# Altium PCB 400006.PcbDoc
Units mil, origin at the board's own origin, x right, y up, seen from the top; angles counter-clockwise.
Board outline 2196 x 1586 mil, 2 copper layers (Top Layer, Bottom Layer), stack 64.409 mil thick; 65 components, 72 nets, 278 pads, 196 vias.
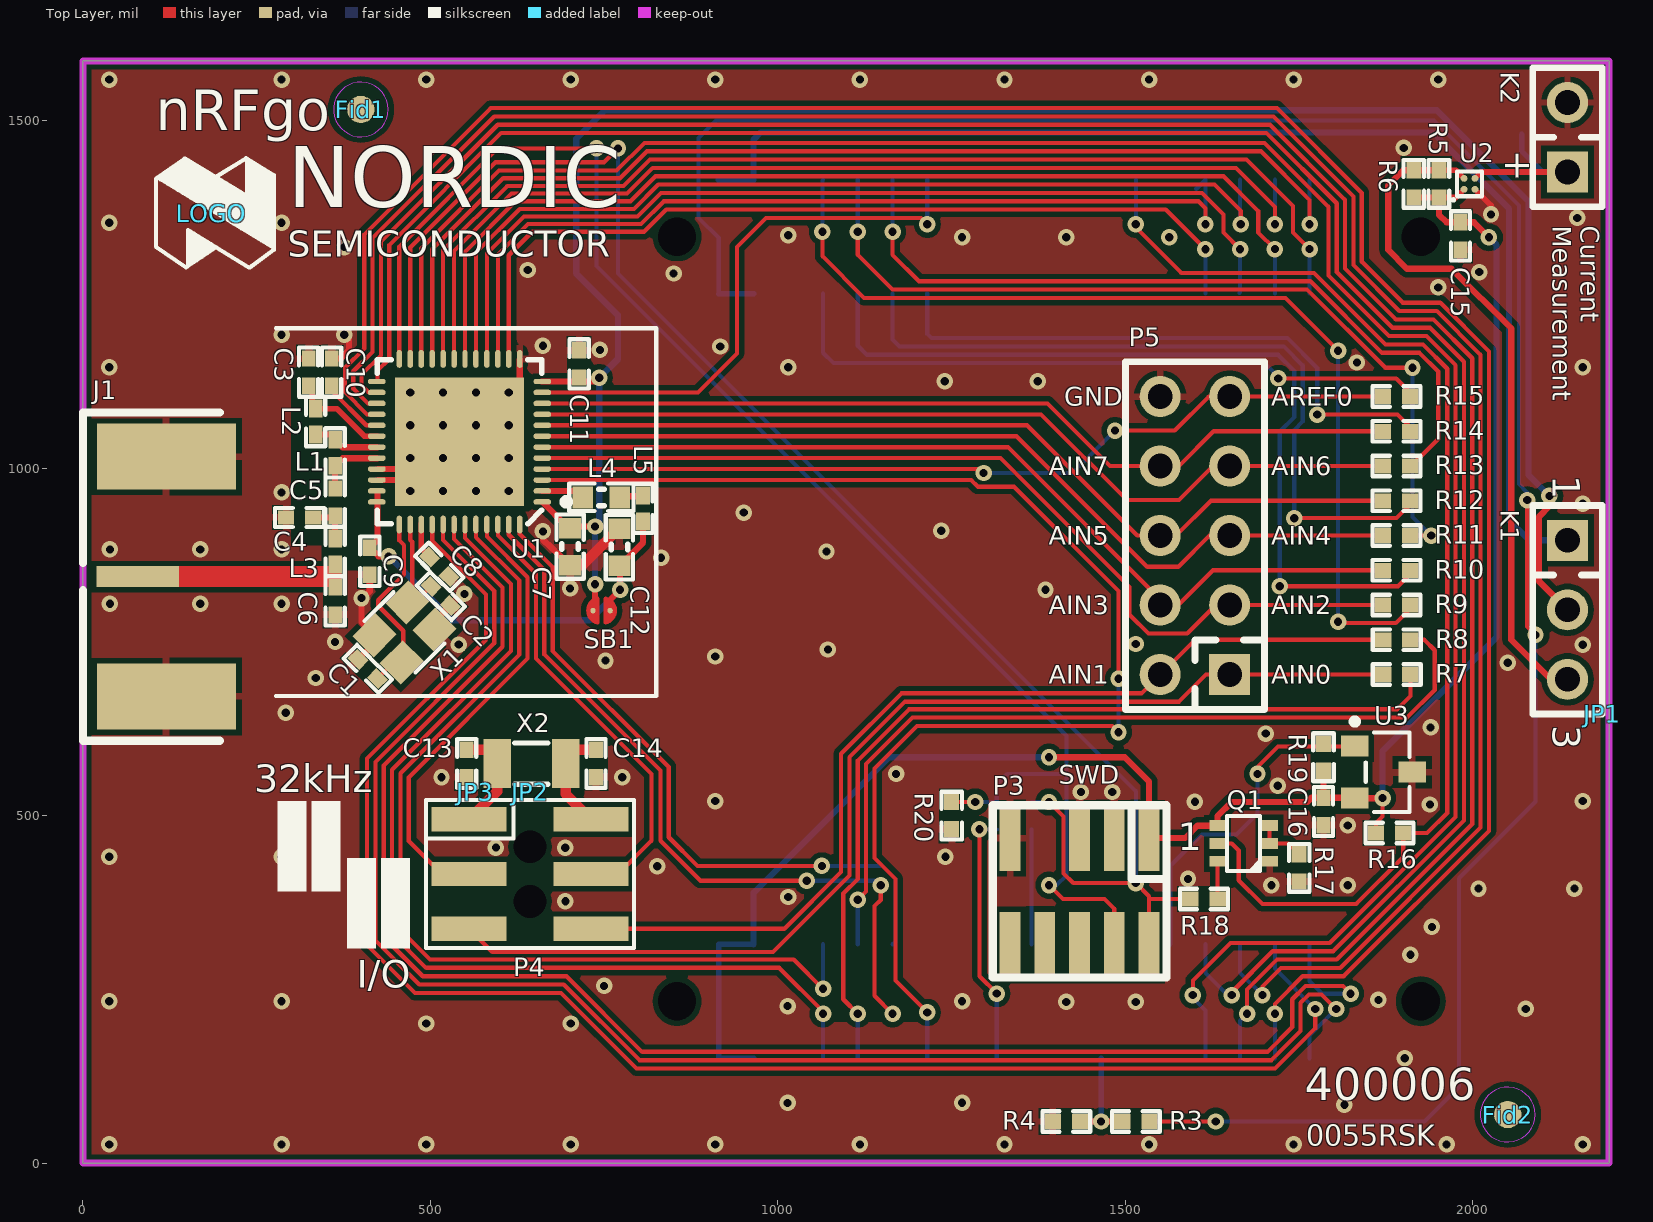
[diagram p0: Top Layer view]
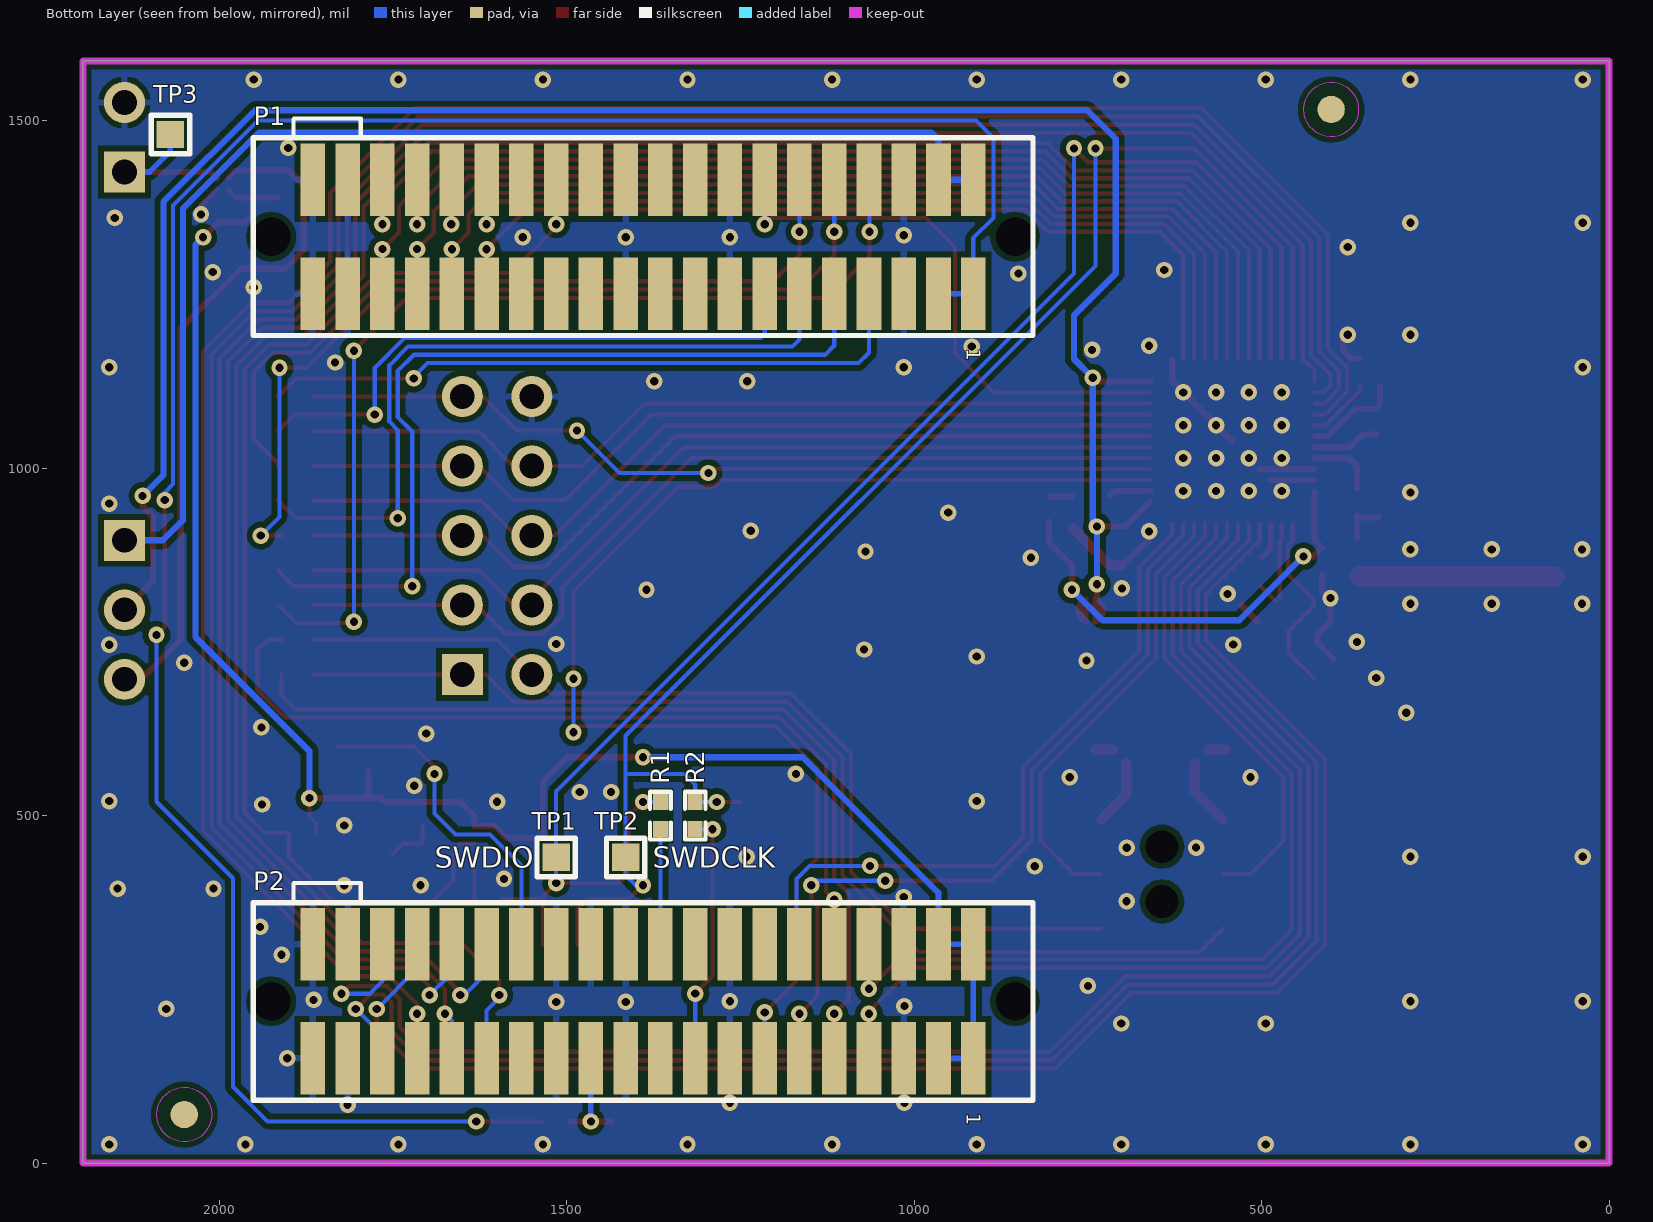
[diagram p1: Bottom Layer view, seen from below]
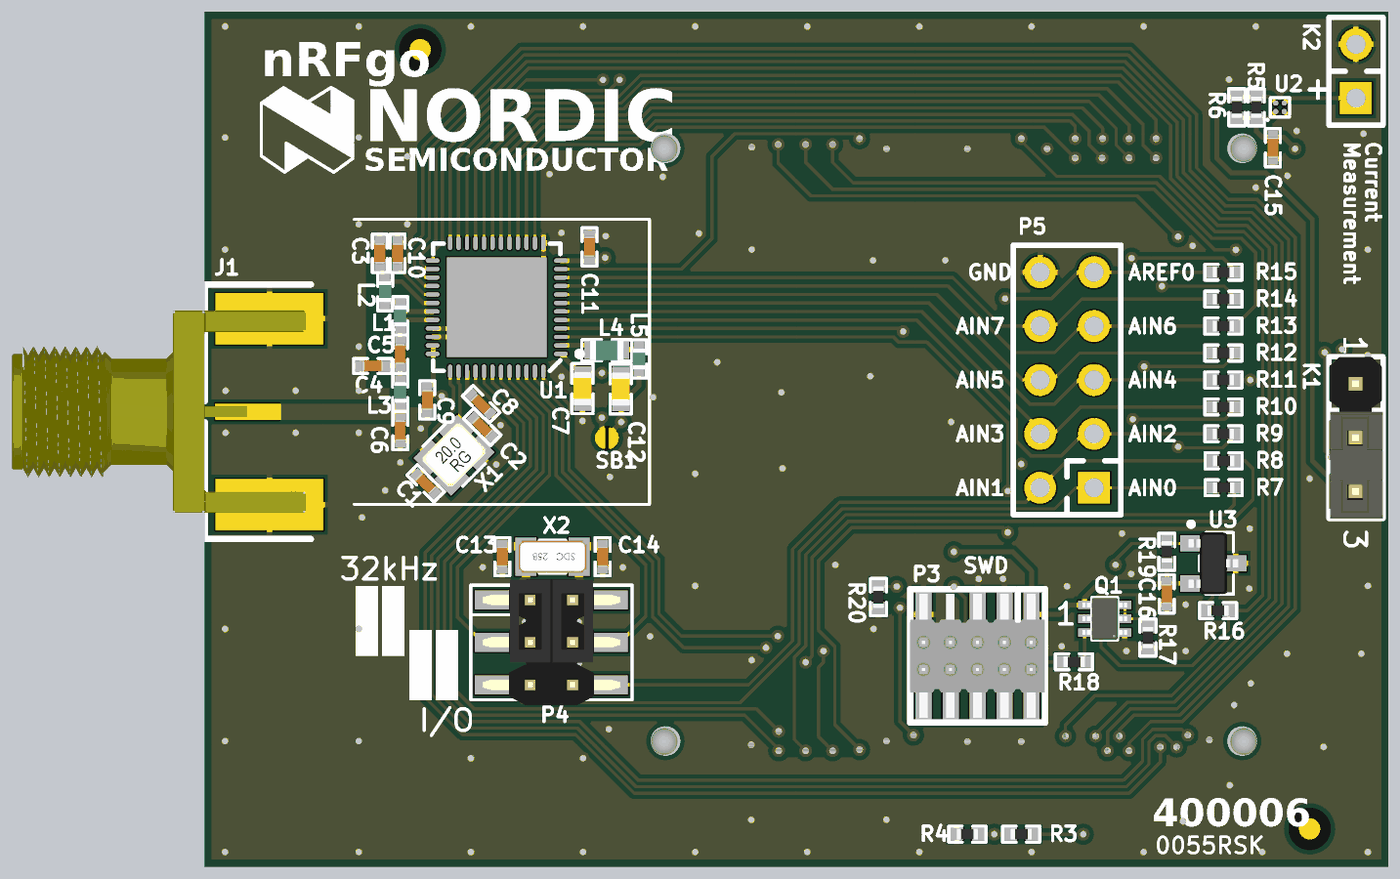
[diagram p2: 3D render of the assembled board from above, using the file's embedded part models]

## Layer stack, top to bottom
Top Layer: signal copper 0.7087
Dielectric: core 62.9921, FR-4, Dk 4.8
Bottom Layer: signal copper 0.7087

## Board outline
0,0 0,1586 2196,1586 2196,0

## Design rules (kind name [scope] priority, off if disabled: settings)
Clearance Clearance_ANT [(InNamedPolygon('Top Layer')) or (InNamedPolygon('Bottom Layer')) vs InNet('ANT')] p1: gap=8
Clearance Clearance_Poly [(InNamedPolygon('Top Layer')) or (InNamedPolygon('Bottom Layer'))] p2: gap=8
Clearance [All] p3: gap=5
ComponentClearance [All] p1 off: gap=10 collisioncheckmode=3 verticalgap=10 showdistances=FALSE
MinimumSolderMaskSliver [All] p1 off: minsoldermaskwidth=10
NetAntennae [All] p1 off: netantennaetolerance=0
PolygonConnect PolygonViaConnect [isVia and innet(gnd)] p1: connectstyle=Direct reliefconductorwidth=10 reliefentries=4 polygonreliefangle="90 Angle" airgapwidth=10
PolygonConnect PolygonConnect_1 [All] p2: connectstyle=Relief reliefconductorwidth=10 reliefentries=4 polygonreliefangle="90 Angle" airgapwidth=10
RoutingVias [All] p1: holewidth=12 width=24 viastyle="Through Hole" minholewidth=11.81 minwidth=23.62 maxholewidth=28 maxwidth=50
SilkToSilkClearance [All] p1 off: silktosilkclearance=10
SilkscreenOverComponentPads [All] p1 off: minsilkscreentomaskgap=10
SolderMaskExpansion [All] p1: expansion=3
Width [All] p1: maxlimit=200 minlimit=6 preferedwidth=6 minimp=50.000000 maximp=50.000000 favimp=50.000000
23 further rules are at their usual default settings.

## Components (designator, comment, footprint, x,y, rotation, side; value= is the part's Value field where it differs from the comment)
C1 "12pF" CAPC1005X04L 410,711 r135 top
C2 "12pF" CAPC1005X04L 515,816 r315 top
C3 "2.2nF" CAPC1005X04L 325,1138 r90 top
C4 "1.0pF" CAPC1005X04L 312,929 r180 top
C5 "2.2pF" CAPC1005X04L 363,951 r270 top
C6 "1.5pF" CAPC1005X04L 363,809 r270 top
C7 "4.7µF" CAPC1608X06L 701,887 r270 top
C8 "100nF" CAPC1005X04L 513,858 r315 top
C9 "1.0nF" CAPC1005X04L 413,866 r270 top
C10 "47nF" CAPC1005X04L 358,1138 r90 top
C11 "100nF" CAPC1005X04L 714,1150 r90 top
C12 "1.0µF" CAPC1608X06L 772,886.23 r90 top
C13 "12pF" CAPC1005X04L 552.39,575 r270 top
C14 "12pF" CAPC1005X04L 738.39,575 r270 top
C15 "100nF" CAPC1005X04L 1982,1334 r270 top
C16 "100nF" CAPC1005X04L 1785,506 r270 top
Fid1 "Fiducial mark" Fiducial 400,1516 r90 top
Fid2 "Fiducial mark" Fiducial 2050,70 r90 top
J1 "SMA Edge" SMA-Edge 79,844 r90 top
JP1 "Shunt 2.54mm" Shunt_2.54mm 2186,646.11 r90 top
JP2 "Shunt 2.00mm" Shunt_2.00mm 643.39,534.11 r270 top
JP3 "Shunt 2.00mm" Shunt_2.00mm 564.65,534.11 r270 top
K1 "Pin List 1x3" LIST_1x3 2136,896.11 r270 top
K2 "Pin List 1x2" LIST_1x2 2136,1426 r90 top
L1 "4.7nH" INDC1005X04L 363,1022 r270 top
L2 "10nH" INDC1005X04L 335,1067 r270 top
L3 "3.3nH" INDC1005X04L 363,880 r270 top
L4 "10µH" INDC1608X06L 746,958 r0 top
L5 "15nH" INDC1005X04L 806,942 r270 top
LOGO "Nordic Logo M" NORDIC_LOGO_M 185.02,1366.38 r0 top
P1 "Samtec SFC-120-T2-L-D-MOD A" "Samtec SFC-120-T2-L-D" 1390,1333 r90 top locked
P2 "Samtec SFC-120-T2-L-D-MOD B" "Samtec SFC-120-T2-L-D" 1390,233 r90 top locked
P3 "FTSH-105" HDR_2x5-SMD-1.27mm-SWD 1434,391 r180 top locked
P4 "Pin Header 2x3 SMD" HDR-2x3-SMD-2.0mm 643.39,416 r0 top
P5 "Pin Header 2x5" HDR_2x5 1600,903 r90 top
Q1 "FDG6321C" SC70-6 1707.4,434.41 r90 top
R1 "N.C." RESC1005X04L 1365,500 r270 bottom
R2 "N.C." RESC1005X04L 1315,500 r270 bottom
R3 "10k" RESC1005X04L 1515,60 r0 top
R4 "82k" RESC1005X04L 1415,60 r0 top
R5 "1R0" RESC1005X04L 1951,1409 r270 top
R6 "1R0" RESC1005X04L 1915,1409 r270 top
R7 "0R" RESC1005X04L 1890.39,703 r180 top
R8 "0R" RESC1005X04L 1890.39,753 r180 top
R9 "0R" RESC1005X04L 1890,803 r0 top
R10 "0R" RESC1005X04L 1890,853 r0 top
R11 "0R" RESC1005X04L 1890,903 r0 top
R12 "0R" RESC1005X04L 1890,953 r0 top
R13 "0R" RESC1005X04L 1890,1003 r0 top
R14 "0R" RESC1005X04L 1890,1053 r0 top
R15 "0R" RESC1005X04L 1890,1103 r0 top
R16 "10k" RESC1005X04L 1880,475 r0 top
R17 "10k" RESC1005X04L 1750,425 r270 top
R18 "150R" RESC1005X04L 1613,380 r0 top
R19 "150k" RESC1005X04L 1785,584 r270 top
R20 "12k" RESC1005X04L 1250,500 r270 top
SB1 "Solderbridge" Solderbridge 734,795 r0 top
TP1 "SWDIO" TP_SMD_1.0mmX1.0mm 1515,440 r180 bottom
TP2 "SWDCLK" TP_SMD_1.0mmX1.0mm 1415,440 r90 bottom
TP3 "1.0mm,SMD" TP_SMD_1.0mmX1.0mm 2070,1480 r270 bottom
U1 "nRF51822-QFAA" QFN40P600X600X90-48N 542,1038 r180 top
U2 "INA216A4" BGA4C40P2X2_76X76X62 1995,1409 r90 top
U3 "11AA160" SOT-23a 1830,600 r270 top
X1 "16MHz" BT-XTAL_2520 462.83,763.62 r45 top
X2 "32.768kHz" FC-135 645.39,575 r180 top

## Footprints (in the part's own frame and the unit in brackets; to place one, negate y for a bottom-side part, rotate by r counter-clockwise, add the part's x,y. Pads: shape width x height; smd on the part's side, far side on the other; paste and mask are expansions set on the pad)
BGA4C40P2X2_76X76X62 [mm] "BGA, 4-Leads, Body 0.8x0.8mm,  Pitch 0.40mm"
  round 0.25 smd: A1(-0.2,0.2) A2(0.2,0.2) B1(-0.2,-0.2) B2(0.2,-0.2)
  silkscreen extent -0.64,-0.45 0.45,0.64, body extent -0.38,-0.38 0.38,0.38, height 0.63
BT-XTAL_2520 [mm] "TSX-2520"
  rect 1.2x1.1 smd: 1(-0.85,-0.7) 2(0.85,-0.7) 3(0.85,0.7) 4(-0.85,0.7)
  silkscreen extent -1.55,-1.33 1.53,1.32, body extent -1.25,-1 1.27,1, height 0.56
CAPC1005X04L [mm] "Chip Capacitor, 2-Leads, Body 1.0x0.5mm, IPC High Density"
  rect 0.6x0.5 smd: 1(-0.5,0) 2(0.5,0)
  silkscreen extent -0.9,-0.35 0.9,0.35, body extent -0.73,-0.73 0.73,0.73, height 0.5
CAPC1608X06L [mm] "Chip Capacitor, 2-Leads, Body 1.6x0.8mm, IPC High Density"
  rect 0.75x0.8 smd: 1(-0.675,0) 2(0.675,0)
  silkscreen extent -1.17,-0.5 1.17,0.5, body extent -0.8,-0.43 0.8,0.43, height 0.8
FC-135 [mm] "EPSON TOYOCOM - FC-135 32.768KHZ ±20PPM,9.0PF - CRYSTAL, SM, WATCH"
  rect 1x1.8 smd: 1(-1.25,0) 2(1.25,0)
  silkscreen extent -0.6,-0.75 0.6,0.75, body extent -1.6,-0.75 1.6,0.75, height 0.81
Fiducial [mm] "Fiducial Mark"
  round 1 smd paste-10 mask+0.5: 0(0,0)
  round 1 smd far side paste-10 mask+0.5: 0(0,0)
  Keep-Out Layer circle w0.01: c0,0 r1
HDR-2x3-SMD-2.0mm [mm]
  round 1 hole 1.2: 0(0,-1) 0(0,1)
  rect 2.75x0.89 smd: 1(-2.225,2) 2(2.225,2) 3(-2.225,0) 4(2.225,0) 5(-2.225,-2) 6(2.225,-2)
  silkscreen extent -3.8,-2.7 3.8,2.7, body extent -3.25,-2.97 3.25,2.98, height 6.5
HDR_2x5 [mm] "Pin Header, 2.54mm through hole"
  rect 1.5x1.5 hole 0.9: 1(-5.08,-1.27)
  round 1.5 hole 0.9: 2(-5.08,1.27) 3(-2.54,-1.27) 4(-2.54,1.27) 5(0,-1.27) 6(0,1.27) 7(2.54,-1.27) 8(2.54,1.27) 9(5.08,-1.27) 10(5.08,1.27)
  silkscreen extent -6.35,-2.54 6.35,2.54
HDR_2x5-SMD-1.27mm-SWD [mm] "Pin Header, 1.27mm SMD, FTSH-105 series, \"SWD\" version"
  rect 0.76x2.4 smd: 1(-2.54,-1.95) 2(-2.54,1.95) 3(-1.27,-1.95) 4(-1.27,1.95) 5(0,-1.95) 6(0,1.95) 8(1.27,1.95) 9(2.54,-1.95) 10(2.54,1.95)
  silkscreen extent -3.18,-3.15 3.18,3.15, body extent -3.16,-2.92 3.19,2.92, height 4.33
INDC1005X04L [mm] "Chip Inductor, 2-Leads, Body 1.0x0.5mm, IPC High Density"
  rect 0.65x0.5 smd: 1(-0.475,0) 2(0.475,0)
  silkscreen extent -0.9,-0.35 0.9,0.35, body extent -0.5,-0.3 0.5,0.3, height 0.5
INDC1608X06L [mm] "Chip Inductor, 2-Leads, Body 1.6x0.8mm, IPC High Density"
  rect 0.75x0.8 smd: 1(-0.675,0) 2(0.675,0)
  silkscreen extent -1.17,-0.5 1.17,0.5, body extent -0.8,-0.48 0.8,0.47, height 0.8
LIST_1x2 [mm] "Pin List, 2.54mm through hole"
  rect 1.5x1.5 hole 0.9: 1(0,0)
  round 1.5 hole 0.9: 2(2.54,0)
  silkscreen extent -1.27,-1.27 3.81,1.27
LIST_1x3 [mm] "Pin List, 2.54mm through hole"
  rect 1.5x1.5 hole 0.9: 1(0,0)
  round 1.5 hole 0.9: 2(2.54,0) 3(5.08,0)
  silkscreen extent -1.27,-1.27 6.35,1.27, body extent -1.27,-1.27 6.25,1.23, height 8.2
NORDIC_LOGO_M [mil] "Medium Nordic Logo"
  silkscreen extent -80,-78 90,80
QFN40P600X600X90-48N [mm] "QFN, 48-Leads, Body 6,0x6,0mm (max), Pitch 0,40mm, IPC Medium Density"
  oval 0.65x0.2 smd: 1(-3.025,2.2) 2(-3.025,1.8) 3(-3.025,1.4) 4(-3.025,1) 5(-3.025,0.6) 6(-3.025,0.2) 7(-3.025,-0.2) 8(-3.025,-0.6) 9(-3.025,-1) 10(-3.025,-1.4) 11(-3.025,-1.8) 12(-3.025,-2.2) 25(3.025,-2.2) 26(3.025,-1.8) 27(3.025,-1.4) 28(3.025,-1) 29(3.025,-0.6) 30(3.025,-0.2) 31(3.025,0.2) 32(3.025,0.6) 33(3.025,1) 34(3.025,1.4) 35(3.025,1.8) 36(3.025,2.2)
  oval 0.2x0.65 smd: 13(-2.2,-3.025) 14(-1.8,-3.025) 15(-1.4,-3.025) 16(-1,-3.025) 17(-0.6,-3.025) 18(-0.2,-3.025) 19(0.2,-3.025) 20(0.6,-3.025) 21(1,-3.025) 22(1.4,-3.025) 23(1.8,-3.025) 24(2.2,-3.025) 37(2.2,3.025) 38(1.8,3.025) 39(1.4,3.025) 40(1,3.025) 41(0.6,3.025) 42(0.2,3.025) 43(-0.2,3.025) 44(-0.6,3.025) 45(-1,3.025) 46(-1.4,3.025) 47(-1.8,3.025) 48(-2.2,3.025)
  rect 4.7x4.7 smd: 49(0,0)
  silkscreen extent -4.03,-3 3,3, body extent -3,-3 3,3, height 0.9
RESC1005X04L [mm] "Chip Resistor, 2-Leads, Body 1.0x0.5mm, IPC High Density"
  rect 0.6x0.55 smd: 1(-0.5,0) 2(0.5,0)
  silkscreen extent -0.87,-0.38 0.88,0.38
"Samtec SFC-120-T2-L-D" [mm] "Samtec SFC series - Female"
  round 0.9 hole 1.4 unplated: 0(0,13.59) 0(0,-13.59)
  rect 2.65x0.9 smd far side: 1(-2.08,12.065) 2(2.08,12.065) 3(-2.08,10.795) 4(2.08,10.795) 5(-2.08,9.525) 6(2.08,9.525) 7(-2.08,8.255) 8(2.08,8.255) 9(-2.08,6.985) 10(2.08,6.985) 11(-2.08,5.715) 12(2.08,5.715) 13(-2.08,4.445) 14(2.08,4.445) 15(-2.08,3.175) 16(2.08,3.175) 17(-2.08,1.905) 18(2.08,1.905) 19(-2.08,0.635) 20(2.08,0.635) 21(-2.08,-0.635) 22(2.08,-0.635) 23(-2.08,-1.905) 24(2.08,-1.905) 25(-2.08,-3.175) 26(2.08,-3.175) 27(-2.08,-4.445) 28(2.08,-4.445) 29(-2.08,-5.715) 30(2.08,-5.715) 31(-2.08,-6.985) 32(2.08,-6.985) 33(-2.08,-8.255) 34(2.08,-8.255) 35(-2.08,-9.525) 36(2.08,-9.525) 37(-2.08,-10.795) 38(2.08,-10.795) 39(-2.08,-12.065) 40(2.08,-12.065)
  body extent -2.12,-14.29 2.13,14.29, height 4.69
SC70-6 [mm] "SC70-6 Industrial Package Dimensions"
  rect 0.4x0.6 smd: 1(0,0) 2(0.65,0) 3(1.3,0) 4(1.3,1.9) 5(0.65,1.9) 6(0,1.9)
  silkscreen extent -0.35,0.35 1.65,1.55, body extent -0.35,-0.1 1.65,2, height 0.92
Shunt_2.00mm [mil]
  body extent 2,2 156,77, height 238
Shunt_2.54mm [mil]
  body extent 0,0 198,98, height 300
SMA-Edge [mil] "SMA Edge connector"
  rect 30x118.11 smd paste-196.85: 1(0,0)
  rect 95x200 smd paste-196.85: 2(-172.5,-41.34) 2(172.5,-41.34)
  silkscreen extent -236,-118 236,79, body extent -187,-108 187,436, height 161
Solderbridge [mm]
  round 0.2 smd paste-10: 1(0,0) 2(0.625,0)
  Top Layer region: 0.236,-0.432 0.16,-0.505 0.042,-0.467 -0.023,-0.424 -0.097,-0.351 -0.15,-0.292 -0.208,-0.193 -0.236,-0.099 -0.231,0.122 -0.206,0.193 -0.122,0.33 -0.038,0.411 0.054,0.469 0.155,0.5 0.206,0.483 0.236,0.43
  Top Layer region: 0.389,0.432 0.465,0.505 0.583,0.467 0.648,0.424 0.721,0.351 0.775,0.292 0.833,0.193 0.861,0.099 0.856,-0.122 0.831,-0.193 0.747,-0.33 0.663,-0.411 0.571,-0.469 0.47,-0.5 0.419,-0.483 0.389,-0.43
  Top Layer lines w0.152: 0.159,-0.431 cw(c0.27,0) 0.159,0.431 ; 0.465,-0.431 ccw(c0.355,0) 0.465,0.431
SOT-23a [mil] "SOT-23 footprint"
  rect 30x40 smd: 1(0,0) 2(74.8,0) 3(37.4,82.68)
  silkscreen extent -39,-4 94,79, body extent -20,-5 95,87, height 39
TP_SMD_1.0mmX1.0mm [mm]
  rect 1x1 smd: 1(0,0)
  silkscreen extent -0.7,-0.7 0.7,0.7

## Part data
C1 C2 C13 C14: library part C0402-12p, "Capacitor, NP0, ±2%"
C3: library part C0402-2n2, "Capacitor, X7R, ±10%"
C4: library part C0402-1.0p, "Capacitor, NP0, ±0.1pF"
C5: library part C0402-2.2p, "Capacitor, NP0, ±0.1pF"
C6: library part C0402-1.5p, "Capacitor, NP0, ±0.1pF"
C7: library part C0603-4µ7, "Capacitor, X5R, ±10%"
C8 C11 C15 C16: library part C0402-100n, "Capacitor, X7R, ±10%"
C9: library part C0402-1n0, "Capacitor, X7R, ±10%"
C10: library part C0402-47n, "Capacitor, X7R, ±10%"
C12: library part C0603-1µ0, "Capacitor, X5R, ±10%"
Fid1 Fid2: library part Fid-Mark, "Fiducial Mark"
J1: library part SMA-Edge-Con, "SMA Edge connector"
JP1: library part "SHUNT JUMPER 2.54mm BLACK GOLD", "SHUNT JUMPER .1\" BLACK GOLD"
JP2 JP3: library part "SHUNT JUMPER 2.00mm BLACK GOLD", "SHUNT JUMPER .079\" BLACK GOLD"
K1: "Pin List 1x3, 2.54mm (100mil)"
K2: "Pin List 1x2, 2.54mm (100mil)"
L1: library part L0402-4n7, "Inductor, 160mA, ±0.1nH"
L2: library part L0402-10n, "Inductor, 100mA, ±2%"
L3: library part L0402-3n3, "Inductor, 190mA, ±0.1nH"
L4: library part L0603-10µ, "Inductor, 80mA, ±10%"
L5: library part L0402-15n, "Inductor, 320mA, ±5%"
LOGO: "Nordic Logo, medium size"
P1 P2: "1.27mm Pitch DIL Vertical SMT Socket Assembly, location pegs, double polarised, gold, 20+20-way"
P3: library part "Samtec Micro Header 10 - SWD", "SAMTEC - FTSH-105-01-L-DV - HEADER, 1.27MM, SMD, 10WAY"
P4: library part "Pin Header 2x3 SMD 2.0mm", "Pin Header 2x3, SMD, 2.0mm"
P5: "Pin Header 2x5, 2.54mm (100mil)"
Q1: "Fairchild, FDG6321C, Dual N & P Channel Digital FET"
R1 R2: library part R0402-N.C., "Not mounted"
R3 R16 R17: library part R0402-10k, "Resistor, ±1%, 0.063W"
R4: library part R0402-82k, "Resistor, ±1%, 0.063W"
R5 R6: library part R0402-1R0, "Resistor, ±1%, 0.063W"
R7 R8 R9 R10 R11 R12 R13 R14 R15: library part R0402-0R, "Resistor, ±5%, 0.063W"
R18: library part R0402-150, "Resistor, ±1%, 0.063W"
R19: library part R0402-150k, "Resistor, ±1%, 0.063W"
R20: library part R0402-12k, "Resistor, ±1%, 0.063W"
TP1 TP2 TP3: library part TP_SMD_1.0MM, "Regular Plated, 1.0mm hole"
U1: library part nRF51822-Q48-6x6_DCDC, "Multi-protocol Bluetooth Low Energy and 2.4GHz proprietary system-on-chip"
U2: "TEXAS INSTRUMENTS - INA216A4YFFT - IC, CURRENT SHUNT MONITOR, 4DSBGA"
U3: library part 11AA160T-I/TT, "MICROCHIP - 11AA160T-I/TT - IC, EEPROM, 16K, 1.8V, UNIO, SOT-23"
X1: library part NX2520SA-16MHZ-STD-CSW-5, "XTAL SMD 2520, 16MHz, 8pF, ±15ppm"
X2: library part "XTAL_FC-135 32.768k", "EPSON TOYOCOM - FC-135 32.768KHZ ±20PPM,9.0PF - CRYSTAL, SM, WATCH"

## Via types
v1: diameter 23.62, hole 11.81, Top Layer to Bottom Layer, tented both sides, 196 vias

## Nets (pads, with @x,y where several pads share a name; then routed paths per layer and width w, separated by ;. In a path a pad name is that pad's centre, name@x,y a point inside that pad or via, vN(x,y) a via of type N, cw(c..) or ccw(c..) an arc to the next point about the centre after c; other vN are vias at no path point)
AIN0: P4.5 P5.1 R7.2 | length 1587.9
  Top Layer w6: P4.5 589.05,304 992.97,304 1103,414.03 1103,584.14 1182.86,664 1577,664 1616,703 R7.2@1865,703
AIN1: P4.6 P5.2 R8.2 | length 1405.9
  Top Layer w6: P4.6 1009.26,337.26 1091,419 1091,589.11 1177.89,676 1523,676 1600,753 R8.2@1865,753
AIN2: P5.3 R9.1 U1.5 | length 1348.7
  Top Layer w6: U1.5 1320.4,1014.38 1506,828.77 1506,789 1533,762 1589,762 1630,803 R9.1@1865,803
AIN3: P5.4 R10.1 U1.6 | length 1318.7
  Top Layer w6: U1.6 1330.87,1030.13 1558,803 1576,803 1626,853 R10.1@1865,853
AIN4: P5.5 R11.1 U1.7 | length 1300.4
  Top Layer w6: U1.7 1343.47,1045.87 1531.34,858 1576,858 1621,903 P5.5 R11.1@1865,903
AIN5: P5.6 R12.1 U1.8 | length 1290.3
  Top Layer w6: U1.8 1358.38,1061.62 1517,903 P5.6 ; P5.6@1573,903 1623,953 R12.1@1865,953
  Top Layer w8: P5.6 P5.6@1573,903
AIN6: P5.7 R13.1 U1.9 | length 1275.3
  Top Layer w6: U1.9 1378.63,1077.37 1502,954 1577,954 1626,1003 R13.1@1865,1003
AIN7: P5.8 R14.1 U1.10 | length 1261.9
  Top Layer w6: U1.10 1387.88,1093.12 1478,1003 P5.8 1577,1003 1627,1053 R14.1@1865,1053
ANT: C6.1 J1.1 L3.2 | length 279
  Top Layer w30: J1.1 358,844
ANT1: L1.1 L2.2 U1.31 | length 96.4
  Top Layer w9: L2.2 355.4,1048.3 373.57,1030.13 U1.31@423.89,1030.13
ANT2: C5.1 L1.2 U1.32 | length 98.2
  Top Layer w9: C5.1 L1.2 374.08,1014.38 U1.32@424,1014.38
AREF0: P5.9 R15.1 U1.4 | length 1251.8
  Top Layer w6: U1.4 1290.37,998.63 v1(1296,993) ; v1(1485,1054) 1571,1054 1620,1103 P5.9 R15.1@1865,1103
  Bottom Layer w6: v1(1296,993) 1424,993 v1(1485,1054)
AVDD: C9.1 C12.1 L5.2 SB1.2 U1.35 U1.36 | length 642.9
  Top Layer w9: U1.35@423.89,966 423.89,896.57 C9.1 425.69,873 v1(440,873) ; 755.64,807.64 757.37,809.37 v1(773,825) 773,860 806,893 L5.2
  Bottom Layer w9: v1(440,873) 532,781 729,781 v1(773,825)
BOARDID: P2.23 R3.1 R4.2 | length 151.7
  Top Layer w8: R4.2 v1(1465,60) R3.1
  Bottom Layer w8: v1(1465,60) P2.23
BOARDID_EE: P2.28 R19.1 U3.1 | length 488.2
  Top Layer w6: v1(1690,560) 1690,570 1719.69,599.69 1785,599.69 U3.1@1829.69,599.69
  Bottom Layer w6: P2.28 1565,428 1610,473 1660,473 1690,503 v1(1690,560)
DEC1: C8.1 U1.39 | length 53
  Top Layer w8: U1.39@486.88,919.89 486.88,884.12 C8.1
DEC2: C10.1 U1.29 | length 93.4
  Top Layer w6: C10.1 358,1111.45 407.83,1061.62 U1.29@423.89,1061.62
GND: C1.2 C2.2 C3.2 C4.2 C6.2 C7.2 C8.2 C9.2 C10.2 C11.2 C12.2 C13.2 C14.2 C15.2 C16.2 J1.2 K2.2 P1.5 P1.6 P1.15 P1.16 P1.21 P1.22 P1.37 P1.38 P1.39 P1.40 P2.5 P2.6 P2.15 P2.16 P2.21 P2.22 P2.24 P2.25 P2.26 P2.37 P2.38 P2.39 P2.40 P3.3 P3.5 P3.9 P5.10 Q1.1 R4.1 R17.2 R20.2 U1.13 U1.33 U1.34 U1.49 U2.B1 U3.3 X1.2 X1.4 | length 733.5
  Top Layer w8: U2.B1 2026,1378 v1(2026,1365)
  Top Layer w9: C10.2 371.35,1157.69 383,1169.33 383,1185 v1(376,1192) ; C1.2 419.85,748.69 419.85,759.82 401,778.67 v1(401,813) ; v1@400,813 v1(401,813) ; C9.2 413,823 403,813 v1(401,813) ; U1.34@423.89,982.88 U1.49@486.88,982.88 ; U1.33@423.89,998.63 U1.49@502.63,998.63 ; U1.49 628.61,1124.61 U1.13@628.61,1156.11 ; v1(662,909) 662.42,896.51 C7.2
  Top Layer w10: X1.2@506.15,779.31 C2.2
  Top Layer w15: C7.2 718.85,860.43 C12.2@772,913.57
  other v1: 38,27 286,27 494,27 702,27 910,27 1118,27 1326,27 1534,27 1742,27 1962,27 2158,27 1815,84 1014,86.69 1265,87 1902,151 494,201 702,201 2076,222 1014,226 1415,232 1515,232 38,233 286,233 1265,233 1864,235 750,255 1910,299.89 1941,340 694.39,377 1015,383 2008,395 2146,395 1710,400 1820,400 1590,409 826.39,427.31 38,441 286,441 1241,441 594.39,454 694,453.77 1820,486 1938,516 1600,520 910,521 2158,521 1436,534 1481,534 1719,543 516,555.31 776,555.31 1170,560 1702,618 1939,627 292,648 335,698 2050,720 752,723.11 910,729 1072,739 541,746.11 2158,746 1515,747 363,750 39,805 169,805 286,805 549,819 1385,825 701,827 832,871 1070,880 39,883 169,883 286,883 1235,910 951,936 2158,949 286,965 471.13,967.13 518.38,967.13 565.62,967.13 612.87,967.13 471.13,1014.38 518.38,1014.38 565.62,1014.38 612.87,1014.38 471.13,1061.62 518.38,1061.62 565.62,1061.62 612.87,1061.62 471.13,1108.87 518.38,1108.87 565.62,1108.87 612.87,1108.87 1240,1125 1374,1125 38,1145 1015,1145 2158,1145 1833,1152 744,1170 917,1175 662,1176 286,1192 1950,1260 850,1280 2009,1282 640,1285 376,1318 1265,1332 1415,1332 1563,1332 1015,1335 38,1353 286,1353 2150,1360 1900.33,1460.69 38,1559 286,1559 494,1559 702,1559 910,1559 1118,1559 1326,1559 1534,1559 1742,1559 1950,1559
NetC4_1: C4.1 C5.2 L3.1 | length 61.6
  Top Layer w9: C4.1 C5.2@360.68,929 ; L3.1 C5.2
NetC13_1: C13.1 P4.1 X2.2 | length 121.1
  Top Layer w15: C13.1 X2.2@576.49,594.68 ; P4.1 596.17,535.13 X2.2
NetC14_1: C14.1 P4.2 X2.1 | length 119.4
  Top Layer w15: X2.1 694.6,531.13 P4.2 ; X2.1@714.28,594.68 C14.1
NetK1_3: K1.3 R5.1 R6.1 U2.A2 | length 992.2
  Top Layer w8: R5.1 1975.32,1428.68 U2.A2
  Top Layer w9: R5.1 1900,1428.68 1878,1406.69 1878,1314 1905,1287 1969,1287 2055,1201 2055,753 2111.89,696.11 K1.3
NetK2_1: K2.1 TP3.1 U2.B2 | length 239.3
  Top Layer w8: U2.B2 2012,1426 K2.1
  Bottom Layer w8: TP3.1 2070,1456 2100,1426 K2.1
NetL4_1: L4.1 U1.2 | length 61.8
  Top Layer w9: U1.2@660.11,967.13 711.87,967.13 L4.1@719,960
NetL4_2: L4.2 L5.1 | length 31.7
  Top Layer w9: L4.2@773.32,959.69 L5.1@804.98,959.69
NetQ1_2: Q1.2 Q1.3 R17.1 | length 74.5
  Top Layer w6: Q1.3 Q1.2 1734.69,460 R17.1
NetQ1_6: Q1.6 R18.2 | length 54.4
  Top Layer w6: R18.2@1632.6,380 Q1.6
NRF_RST: P1.26 Q1.5 R16.2 | length 1705.8
  Top Layer w6: v1(1515,1350.89) 1515,1346.3 1580.41,1280.89 1771.32,1280.89 1874.32,1177.89 1928.11,1177.89 1963,1143 1963,504 1934,475 R16.2 1899.69,440.69 1832,373 1697,373 1663,407 1663,450 1653,460 Q1.5
  Bottom Layer w6: v1(1515,1350.89) P1.26
P0.00: P1.7 R15.2 | length 966.4
  Top Layer w6: v1(1720,1129) 1889.59,1129 R15.2@1915.59,1103
  Bottom Layer w6: P1.7 1065,1166 1080,1151 1700,1151 v1@1723.83,1127.17
P0.01: P1.8 R9.2 | length 1423.1
  Top Layer w6: v1(1064,1340) 1064,1304.89 1124,1244.89 1730.11,1244.89 v1(1806,1169) ; v1(1806,779) 1808,777 1889,777 R9.2@1915,803
  Bottom Layer w6: v1(1064,1340) 1064,1413.89 P1.8 ; v1@1806,1170 v1(1806,779) v1@1808,777
P0.02: P1.9 R10.2 | length 1239.2
  Top Layer w6: v1(1722,830) 1892,830 R10.2@1915,853
  Bottom Layer w6: P1.9 1115,1176 1128,1163 1719.89,1163 1743,1139.89 1743,1073.56 1722,1052.56 v1(1722,830)
P0.03: P1.10 R11.2 | length 1255.1
  Top Layer w6: v1(1115,1340) 1115,1306.89 1165,1256.89 1761.38,1256.89 1873.77,1144.5 v1@1912,1144.5 ; R11.2 v1(1939.89,903)
  Bottom Layer w6: v1(1115,1340) P1.10 ; v1(1913,1144.5) 1913,929.89 v1(1939.89,903)
P0.04: P1.11 R12.2 | length 1078.7
  Top Layer w6: v1(1743,928) 1890,928 R12.2@1915,953
  Bottom Layer w6: P1.11 1165,1185 1175,1175 1727.89,1175 1755,1147.89 1755,1067 1743,1055 v1(1743,928)
P0.05: P1.12 R13.2 | length 1113
  Top Layer w6: v1(1165,1340) 1165,1306.89 1203,1268.89 1766.35,1268.89 1869.35,1165.89 1923,1165.89 1950,1138.89 1950,1042 1915,1007 R13.2@1915,1003
  Bottom Layer w6: v1(1165,1340) P1.12
P0.06: P1.13 R14.2 | length 857.9
  Top Layer w6: v1(1776,1077) 1891.59,1077 R14.2@1915.59,1053 ; R14.2@1913,1053 R14.2@1915,1053
  Bottom Layer w6: P1.13 1215,1193 1221,1187 1732.89,1187 1776,1143.89 v1(1776,1077)
P0.07: P1.14 U1.11 | length 815.2
  Top Layer w6: U1.11 884.87,1108.87 941,1165 941,1318 982.89,1359.89 1206,1359.89 v1(1215,1350.89)
  Bottom Layer w6: v1(1215,1350.89) P1.14
P0.08: P1.29 U1.14 | length 1265.9
  Top Layer w6: U1.14 612.87,1306.28 646.59,1340 807.56,1340 839.45,1371.89 1558,1371.89 v1(1615,1314.89)
  Bottom Layer w6: P1.29 v1(1615,1314.89)
P0.09: P1.30 U1.15 | length 1307.3
  Top Layer w6: U1.15 597.12,1307.5 640.62,1351 803,1351 835.89,1383.89 1605,1383.89 1615,1373.89 v1(1615,1350.89)
  Bottom Layer w6: P1.30@1602,1401.89 P1.30 v1@1615,1353
P0.10: P1.31 U1.16 | length 1383.3
  Top Layer w6: U1.16 581.37,1308.72 634.65,1362 798,1362 831.89,1395.89 1609.97,1395.89 1641,1364.86 1641,1338.89 v1(1665,1314.89)
  Bottom Layer w6: P1.31@1664,1252.11 1665,1253.11 v1(1665,1314.89)
P0.11: P1.32 U1.17 | length 1393
  Top Layer w6: U1.17 565.62,1309.95 628.68,1373 793,1373 827.89,1407.89 1628,1407.89 1666,1369.89 v1(1666,1350.89)
  Bottom Layer w6: P1.32 1665,1351.89 v1(1666,1350.89)
P0.12: P1.33 U1.18 | length 1489.7
  Top Layer w6: U1.18 549.87,1311.17 622.71,1384 788,1384 823.89,1419.89 1641,1419.89 1691,1369.89 1691,1339.11 v1(1715,1315.11)
  Bottom Layer w6: P1.33 v1(1715,1315.11)
P0.13: P1.34 U1.19 | length 1497.9
  Top Layer w6: U1.19 534.13,1312.39 616.73,1395 783,1395 819.89,1431.89 1659,1431.89 1715,1375.89 v1(1715,1350.89)
  Bottom Layer w6: v1(1715,1350.89) P1.34
P0.14: P1.35 U1.20 | length 1594.9
  Top Layer w6: U1.20 518.38,1313.61 610.76,1406 778,1406 815.89,1443.89 1674,1443.89 1741,1376.89 1741,1339.11 v1(1765,1315.11)
  Bottom Layer w6: P1.35 1765,1312 v1@1766,1313
P0.15: P1.36 U1.21 | length 1606.5
  Top Layer w6: U1.21 502.63,1314.84 604.79,1417 773,1417 811.89,1455.89 1695,1455.89 1765,1385.89 v1(1765,1350.89)
  Bottom Layer w6: v1(1765,1350.89) P1.36
P0.16: P2.29 U1.22 | length 3150.9
  Top Layer w6: U1.22 486.88,1316.06 598.82,1428 768,1428 807.89,1467.89 1700.03,1467.89 1792,1375.92 1792,1277.18 1879.29,1189.89 1933.18,1189.89 1975,1148.07 1975,498 1794,317 1651.11,317 1597,262.89 v1(1597,241.89)
  Bottom Layer w6: v1@1590,244.89 1615,219.89 P2.29
P0.17: P2.30 U1.25 | length 3192.9
  Top Layer w6: U1.25@423.89,1124.61 423.89,1140.22 441,1157.33 441,1321.09 601.91,1482 1703,1482 1804,1381 1804,1282 1884,1202 1938,1202 1987,1153 1987,493 1799,305 1712,305 1653,246 v1(1653,241.89)
  Bottom Layer w6: P2.30 1615,273.89 v1@1644,244.89
P0.18: P2.31 U1.26 | length 3277.8
  Top Layer w6: U1.26@423.89,1108.87 411.5,1108.87 401.11,1119.26 401.11,1134.41 429,1162.3 429,1326.06 596.94,1494 1708,1494 1816,1386 1816,1287 1889,1214 1943,1214 1999,1158 1999,488 1804,293 1718,293 1675,250 v1(1675,214.89)
  Bottom Layer w6: P2.31 1665,204.89 v1(1675,214.89)
P0.19: P2.32 U1.27 | length 3331.7
  Top Layer w6: U1.27@423.89,1093.12 410.28,1093.12 389.11,1114.29 389.11,1139.38 417,1167.27 417,1331.03 591.97,1506 1713,1506 1828,1391 1828,1292 1894,1226 1948,1226 2011,1163 2011,483 1809,281 1724,281 1697,254 v1(1697,241.89)
  Bottom Layer w6: P2.32 1665,273.89 v1(1697,241.89) ; v1@1691,241.89 v1@1691,248
P0.20: P2.33 U1.28 | length 3373.6
  Top Layer w6: U1.28@423.89,1077.37 409.05,1077.37 377.11,1109.31 377.11,1144.35 405,1172.24 405,1336 587,1518 1718,1518 1840,1396 1840,1297 1899,1238 1953,1238 2023,1168 2023,478 1814,269 1755,269 1715,229 v1(1715,215)
  Bottom Layer w6: P2.33 v1(1715,215)
P0.21: P2.34 U1.40 | length 2315.2
  Top Layer w6: U1.40@502.63,919.89 502.63,895.58 580,818.21 580,753.1 409,582.1 409,314.11 478.11,245 688,245 796.77,136.23 1715.34,136.23 1773,193.89 v1(1773,221.89)
  Bottom Layer w6: P2.34 1715,279.89 v1(1773,221.89)
P0.22: P2.35 U1.41 | length 2312.9
  Top Layer w6: U1.41@518.38,919.89 518.38,896.8 592,823.18 592,748.11 421,577.11 421,320.11 484.11,257 692,257 800.77,148.23 1710.23,148.23 1752,190 1752,230.89 1764,242.89 1782.17,242.89 v1(1803.17,221.89)
  Bottom Layer w6: P2.35 1765,183.72 v1(1803.17,221.89)
P0.23: P2.36 U1.42 | length 2340.5
  Top Layer w6: U1.42@534.13,919.89 534.13,898.02 604,828.15 604,743 433,572 433,325.11 489.11,269 696,269 804.77,160.23 1704.34,160.23 1740,195.89 1740,235.89 1759,254.89 1813,254.89 v1(1824,243.89)
  Bottom Layer w6: P2.36 1765,261.89 1783,243.89 v1(1824,243.89)
P0.24: P2.7 U1.43 | length 1418.2
  Top Layer w6: U1.43@549.87,919.89 549.87,899.24 616,833.12 616,737.11 445,566.11 445,330.11 494,281.11 1002,281.11 v1@1065,218.11
  Bottom Layer w6: P2.7 v1(1065,214.89)
P0.25: P2.8 U1.44 | length 1388.2
  Top Layer w6: U1.44@565.62,919.89 565.62,900.47 628,838.09 628,732 457,561 457,335.39 499.39,293 1022.89,293 v1(1065,250.89)
  Bottom Layer w6: v1(1065,250.89) P2.8
P0.26: P2.9 R7.1 | length 1309.9
  Top Layer w6: v1(1115,214.89) 1094,235.89 1094,388 1115,409 1115,579.17 1188.83,653 1891,653 1910.07,672.07 R7.1
  Bottom Layer w6: P2.9 v1(1115,214.89)
P0.27: P2.10 R8.1 | length 1224.7
  Top Layer w6: v1(1115,379) 1127,391 1127,574.2 1193.8,641 1905,641 1945,681 1945,738 1930,753 R8.1
  Bottom Layer w6: P2.10 v1(1115,379)
P0.28: P2.11 U1.47 | length 1089.2
  Top Layer w6: U1.47@612.87,919.89 612.87,904.13 664,853 664,732 831,565 831,463.89 888.57,406.31 v1(1041.39,406.31) ; v1(1148,399.89) 1148,378.89 1139,369.89 1139,240.89 v1(1165,214.89)
  Bottom Layer w6: v1(1041.39,406.31) 1141.57,406.31 v1@1147.89,400
P0.29: P2.12 U1.48 | length 986.3
  Top Layer w6: U1.48@628.61,919.89 628.61,905.36 676,857.97 676,737.11 843,570.11 843,469 884.36,427.64 v1(1063.39,427.64)
  Bottom Layer w6: v1(1063.39,427.64) 1150.36,427.64 1169,409 1169,318.89 P2.12
P0.30: P2.13 U1.3 | length 1926.5
  Top Layer w6: U1.3 1278.1,982.88 1287.79,973.19 1339.81,973.19 1490,823 v1(1490,697) ; v1(1215,217) 1169,263 1169,409 1139,439 1139,568 1200,629 1481,629 v1(1490,620)
  Bottom Layer w6: P2.13 v1(1215,217) ; v1(1490,620) v1(1490,697)
SWDCLK: P3.4 R2.1 R20.1 TP2.1 U1.24 | length 2216.8
  Top Layer w6: U1.24 455.39,1318.5 596.88,1460 v1(739,1460) ; R20.1 v1(1284,519.69) ; v1(1390,400) 1410,380 1470,380 1484,366 P3.4
  Bottom Layer w6: v1(739,1460) 739,1291 1415,615 TP2.1 1415,414 1401,400 v1(1390,400) ; v1(1284,519.69) R2.1 1315,545 1330,560 1415,560
SWDCLK': P2.17 R2.2 | length 364.6
  Top Layer w6: v1(1290,480.31) 1290,269 v1(1315,244)
  Bottom Layer w6: v1(1290,480.31) R2.2 ; P2.17 v1(1315,244)
SWDIO: P3.2 R1.1 R18.1 TP1.1 U1.23 | length 2285.9
  Top Layer w6: U1.23 471.13,1317.28 593.85,1440 750,1440 v1(770,1460) ; v1(1390,519.69) 1411.04,498.65 1411.04,416.96 1425,403 v1(1515,403) 1534,384 1534,380 ; P3.2 1534,380 ; R18.1 1534,380
  Bottom Layer w6: v1(770,1460) 770,1280 1515,535 TP1.1 v1(1515,403) ; R1.1 v1(1390,519.69)
SWDIO': P2.20 R1.2 | length 165.4
  Bottom Layer w6: P2.20 R1.2
VCC: P1.1 P1.3 R3.2 | length 3316.3
  Top Layer w6: R3.2 v1(1630,60) ; v1(2078,954) 2078,772 v1(2090,760)
  Bottom Layer w6: P1.1 915,1331 886,1360 886,1475 911,1500 1944,1500 2066,1378 2066,977 2078,965 v1(2078,954) ; v1(1630,60) 1930,60 1980,110 1980,410 2090,520 v1(2090,760)
  Bottom Layer w8: P1.1 P1.3
VCC_NRF: C7.1 C11.1 K1.2 SB1.1 U1.1 U1.12 | length 2941.9
  Top Layer w9: U1.12@660.11,1124.61 v1@741.61,1124.61 ; U1.1 696.48,916 v1(737,916) ; 737,805.87 v1(737,833) ; v1(2110,960) 2110,945 2095,930 2095,837.11 K1.2
  Bottom Layer w9: v1(737,833) v1(737,916) 743,922 v1@743,1129 ; v1(743,1130) 770,1157 770,1220 710,1280 710,1474 751,1515 1948,1515 2080,1383 2080,990 v1(2110,960)
VCC_NRF': K1.1 P1.2 P1.4 | length 1788.6
  Bottom Layer w9: P1.2 P1.4 965,1472.77 975.23,1483 1942,1483 2052,1373 2052,925 2080.89,896.11 K1.1
VDD_PA: C3.1 L2.1 U1.30 | length 140.1
  Top Layer w8: C3.1@330,1118.32 330,1090.7 L2.1 365.37,1085.7 405.2,1045.87 U1.30@423.89,1045.87
VTG: C15.1 C16.1 P2.1 P2.2 P2.3 P2.4 P3.1 Q1.4 R5.2 R6.2 R16.1 R19.2 U2.A1 U3.2 | length 2612.1
  Top Layer w6: R16.1 1860.32,489.31 1870,499 v1(1870,525.2)
  Top Layer w8: R5.2 1975.32,1389.31 U2.A1
  Top Layer w9: v1(1390,584) 1499,584 1534,549 P3.1 1585.77,467.77 1603.59,485.59 Q1.4 1632.6,499.6 1652.69,519.69 1761.69,519.69 1767.69,525.69 C16.1 ; R19.2 C16.1 ; U3.2@1829.51,525.69 C16.1 ; U3.2 v1(1870,525.2) ; R6.2 R5.2 1951,1364.69 1962,1353.69 C15.1 2001.32,1353.69 v1(2023,1332)
  Bottom Layer w8: P2.3 P2.1 P2.2 P2.4
  Bottom Layer w9: P2.4 965,389 1160,584 1386,584 v1@1390,580 ; v1(1870,525.2) 1870,593 2034,757 2034,1321 v1(2023,1332)
XC1: C1.1 U1.37 X1.1 | length 270.1
  Top Layer w6: C1.1 461,734.16 461,766 425,802 425,810 461.88,846.88 461.88,889.15 455.39,895.64 U1.37
XC2: C2.1 U1.38 X1.3 | length 135.8
  Top Layer w6: U1.38 471.13,896.87 473.88,894.12 X1.3@473.88,813.86 ; X1.3@480.16,809 C2.1
XL1: P4.3 U1.45 | length 658
  Top Layer w6: P4.3 516.39,416 469,463.39 469,555.11 640,726.11 640,843.06 581.37,901.69 U1.45@581.37,919.89
XL2: P4.4 U1.46 | length 653.8
  Top Layer w6: U1.46@597.12,919.89 597.12,902.91 652,848.03 652,726.11 818.39,559.72 818.39,464 770.39,416 P4.4@732,416
pads on no net: Fid1.0 Fid2.0 P1.0 P1.17 P1.18 P1.19 P1.20 P1.23 P1.24 P1.25 P1.27 P1.28 P2.0 P2.14 P2.18 P2.19 P2.27 P3.6 P3.8 P3.10 P4.0

## Polygon pours and split planes (outlines as drawn)
GND on Top Layer "Top Layer" (solid, remove dead copper, pour order 4): 0,1600 2500,1600 2500,0 0,0
GND on Bottom Layer "Bottom Layer" (solid, remove dead copper, pour order 3): -10.5,1610.38 -2.5,1618.38 2241.5,1618.38 2241.5,-65.62 -10.5,-65.62

## Keep-outs
Keep-Out Layer:
  the board outline again, w10

## Other copper
Top Layer:
  pour cut-out: 1975,1429 2015,1429 2015,1389 1975,1389
  pour cut-out: 343,915 411,915 411,852 343,852
  pour cut-out: 488.42,856.58 515.03,883.18 536.95,861.26 510.34,834.66
  pour cut-out: 443.98,1138 640,1138 640,940 444.03,940
  pour cut-out: 299,1145 396,1145 396,888 299,888
  pour cut-out: 1858.75,1006.52 1926.75,1006.52 1926.75,943.52 1858.75,943.52
  pour cut-out: 1859.17,905.88 1927.17,905.88 1927.17,842.88 1859.17,842.88
  pour cut-out: 1788,591.5 1856,591.5 1856,528.5 1788,528.5
  pour cut-out: 1063.25,214.55 1226.73,214.55 1226.73,202.9 1063.25,202.9
  pour cut-out: 1469.8,1058.13 1537.8,1058.13 1537.8,995.13 1469.8,995.13
  pour cut-out: 1314,367 1554,367 1554,258 1314,258

## Silkscreen, mask and mechanical layers (free items; w line width, h text height)
Top Overlay:
  rectangle: 279.9,391.06 321.9,521.06
  rectangle: 328.9,391.06 370.9,521.06
  rectangle: 428.9,309.06 470.9,439.06
  rectangle: 379.9,309.06 421.9,439.06
  lines w6: 277.95,672.19 824.95,672.19 824.95,1201.19 277.95,1201.19
  text "nRFgo" at 105.02,1466.38 h100
  text "+" at 2081,1412 h40 r90
  text "Measurement" at 2115,1349 h27 r270
  text "Current" at 2155,1349 h27 r270
  text "NORDIC" at 295.02,1346.38 h150
  text "SEMICONDUCTOR" at 295.02,1291.38 h65
  text "GND" at 1412,1090 h27
  text "AREF0" at 1710,1090 h27
  text "AIN7" at 1390,990 h27
  text "AIN6" at 1710,990 h27
  text "1" at 2115,990 h40 r270
  text "AIN5" at 1390,890 h27
  text "AIN4" at 1710,890 h27
  text "AIN3" at 1390,790 h27
  text "AIN2" at 1710,790 h27
  text "AIN1" at 1390,690 h27
  text "AIN0" at 1710,690 h27
  text "3" at 2115,630 h40 r270
  text "SWD" at 1404,546 h27
  text "32kHz" at 246.97,533.53 h40
  text "I/O" at 393.84,252.55 h40
  text "400006" at 1758,75 h80
  text "0055RSK" at 1760,25 h30
Mechanical 1:
  the board outline again, w10

## Text inside footprints (layer, text, board x,y; h text height)
P1: Bottom Overlay "1" at 924,1172 h20 r90
P2: Bottom Overlay "1" at 924,72 h20 r90
P3: Top Overlay "1" at 1575,450 h40